# EAGLE board Power Circuit (EAGLE 8.6.0)
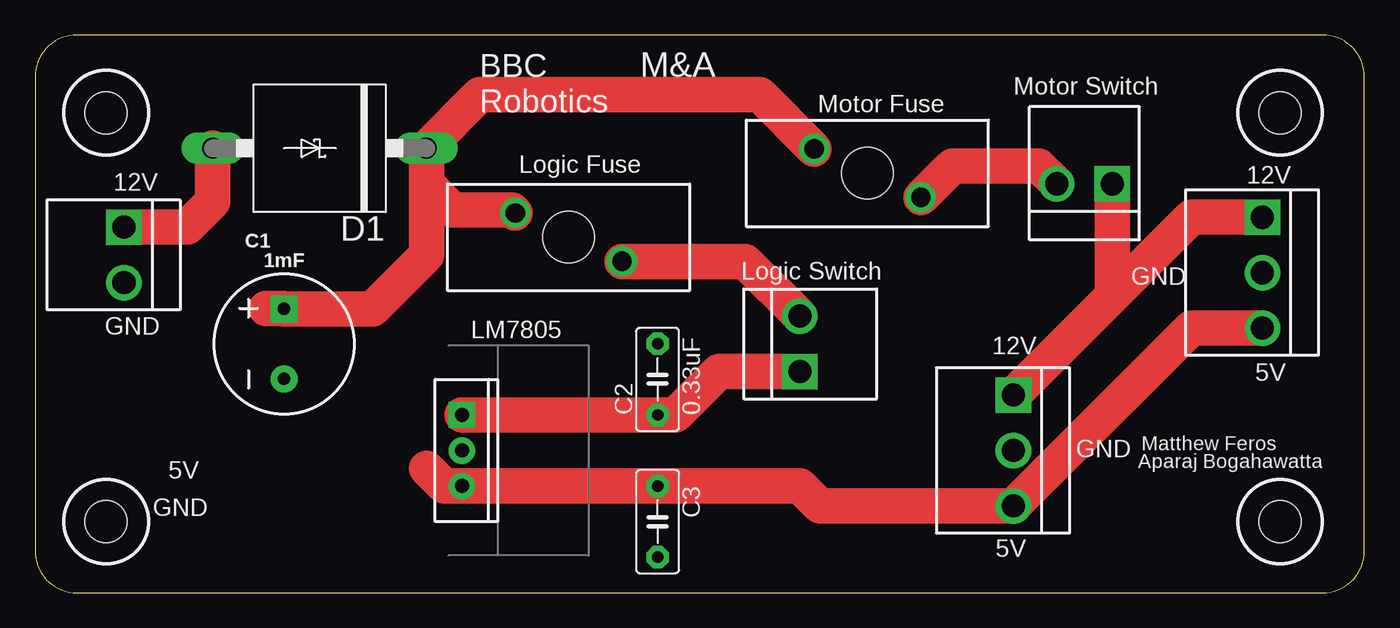
[diagram p0: board, top side]
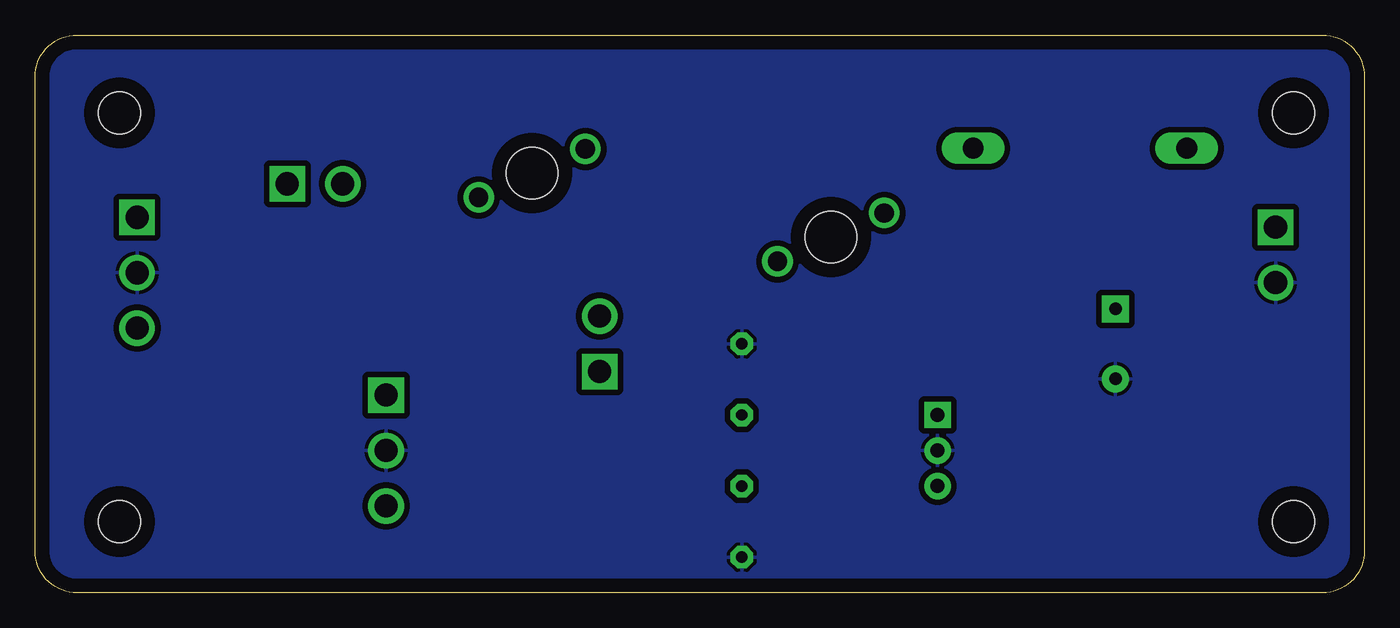
[diagram p1: board, bottom side, seen from below]

Size 94.92 x 39.84 mm. Coordinates in mm from the lower left corner, seen from the top.
Outline: 3,0 91.92,0 arc90 94.92,3 94.92,36.84 arc90 91.92,39.84 3,39.84 arc90 0,36.84 0,3 arc90 3,0
Copper layers (1*16): Top 0.035mm / dielectric 1.5mm / Bottom 0.035mm
Design rules "default": minimum track width 6mil, minimum drill 0.35mm, track to track 6mil, track to pad 6mil, pad to pad 6mil, via to via 6mil, smd to smd 6mil, copper to edge 40mil, drill to drill 6mil, minimum pad ring 10mil, minimum via ring 8mil, stop-mask expansion 4mil, vias tented up to drill 0mil, thermal gap 10mil
Holes 3 mm at 5.08,34.29 88.9,34.29 88.9,5.08 5.08,5.08

## Footprints (pad centres in the part's own frame; a part is rotated, then mirrored left to right if it is on the bottom)
CPOL-RADIAL-5MM-10MM = drill 0.9 pad 1.93 square: + 2.5,0 | drill 0.9 pad 1.93: - -2.5,0
C5B3 = drill 0.813 pad 1.6 octagon: 1 -2.54,0; 2 2.54,0
P6T15 = drill 1.499 long: A 7.62,0; C -7.62,0
B2P-VH = drill 1.651 pad 2.54 square: 1 -1.98,0 | drill 1.651 pad 2.54: 2 1.98,0
SL-1538 = drill 1.37 pad 2.184: P$1 1.73,3.81; P$2 -1.73,-3.81 | hole 3.683: 0,0
B3P-VH = drill 1.651 pad 2.54 square: 1 -3.96,0 | drill 1.651 pad 2.54: 2 0,0; 3 3.96,0
TO220-ADJ = drill 1 pad 1.88: GND 0,0; OUTPUT 2.54,0 | drill 1 pad 1.88 square: INPUT -2.54,0

## Placement (x,y rotation side)
C1  1mF  [CPOL-RADIAL-5MM-10MM]  17.78,17.78 90 top
C2  0.33uF  [C5B3]  44.45,15.24 90 top
C3  0.1uF  [C5B3]  44.45,5.08 270 top
D1  [P6T15]  20.32,31.75 180 top
U$1  BATT  [B2P-VH]  6.35,24.13 270 top
U$2  MOTOR FUSE  [SL-1538]  59.44,29.97 90 top
U$3  MOTOR SWITCH  [B2P-VH]  74.93,29.21 180 top
U$4  CONN_03_JST-VH  [B3P-VH]  87.63,22.86 270 top
U$5  CONN_03_JST-VH  [B3P-VH]  69.85,10.16 270 top
U$6  LOGIC FUSE  [SL-1538]  38.1,25.4 90 top
U$7  LOGIC SWITCH  [B2P-VH]  54.61,17.78 90 top
U$8  LM7805  [TO220-ADJ]  30.48,10.16 270 top

## Library data of the parts
C1 = SparkFun-Capacitors; PROD_ID: CAP-09538
C2 C3 = capacitor-wima
D1 = diode
U$1 U$3-U$5 U$7 = JST-VH
U$2 U$6 = Fuse_Holder
U$8 = LM7805

## Nets
GND: C1.- C2.2 C3.2 U$1.2 U$4.2 U$5.2 U$8.GND
N$1: D1.A U$1.1
N$2: C1.+ D1.C U$2.P$1 U$6.P$1
N$3: U$3.1 U$4.1 U$5.1
N$4: U$2.P$2 U$3.2
N$5: U$6.P$2 U$7.2
N$6: C2.1 U$7.1 U$8.INPUT
N$9: C3.1 U$4.3 U$5.3 U$8.OUTPUT

## Tracks (layer width: path | path; a pad name or v marks a point on that pad's centre or on a via)
GND
  pour Bottom (isolate 0.406): -2.54,53.34 -2.54,-2.54 102.87,-2.54 102.87,52.07 101.6,53.34
N$1
  Top 2.54: U$1.1 10.87,26.11 12.7,27.94 D1.A
N$2
  Top 2.54: 27.94,29.21 D1.C 31.75,35.56 51.77,35.56 U$2.P$1 | 27.94,29.21 29.8,27.35 34.07,27.35 U$6.P$1 | 27.94,29.21 27.94,24.13 24.09,20.28 C1.+ 17.74,20.32 16.51,20.32
N$3
  Top 2.54: U$5.1 76.91,21.18 | 76.91,21.18 U$3.1 | 76.91,21.18 82.55,26.82 U$4.1
N$4
  Top 2.54: U$2.P$2 65.48,30.48 71.68,30.48 U$3.2
N$5
  Top 2.54: U$6.P$2 50.7,23.67 U$7.2
N$6
  Top 2.54: U$8.INPUT C2.1 45.72,12.7 48.82,15.8 U$7.1
N$9
  Top 2.54: U$4.3 82.55,18.9 U$5.3 56.03,6.2 54.61,7.62 C3.1 U$8.OUTPUT 29.21,7.62 27.94,8.89

## Text on the board
tPlace: M&A | Motor Switch | BBC / Robotics | Motor Fuse | Logic Fuse | 12V | 12V | Logic Switch | GND | GND | LM7805 | 12V | 5V | GND | Matthew Feros | Aparaj Bogahawatta | 5V | GND | 5V